# EAGLE board T01_Synth_Glove_v5_nsayre_revisions_late_am (EAGLE 7.1.0)
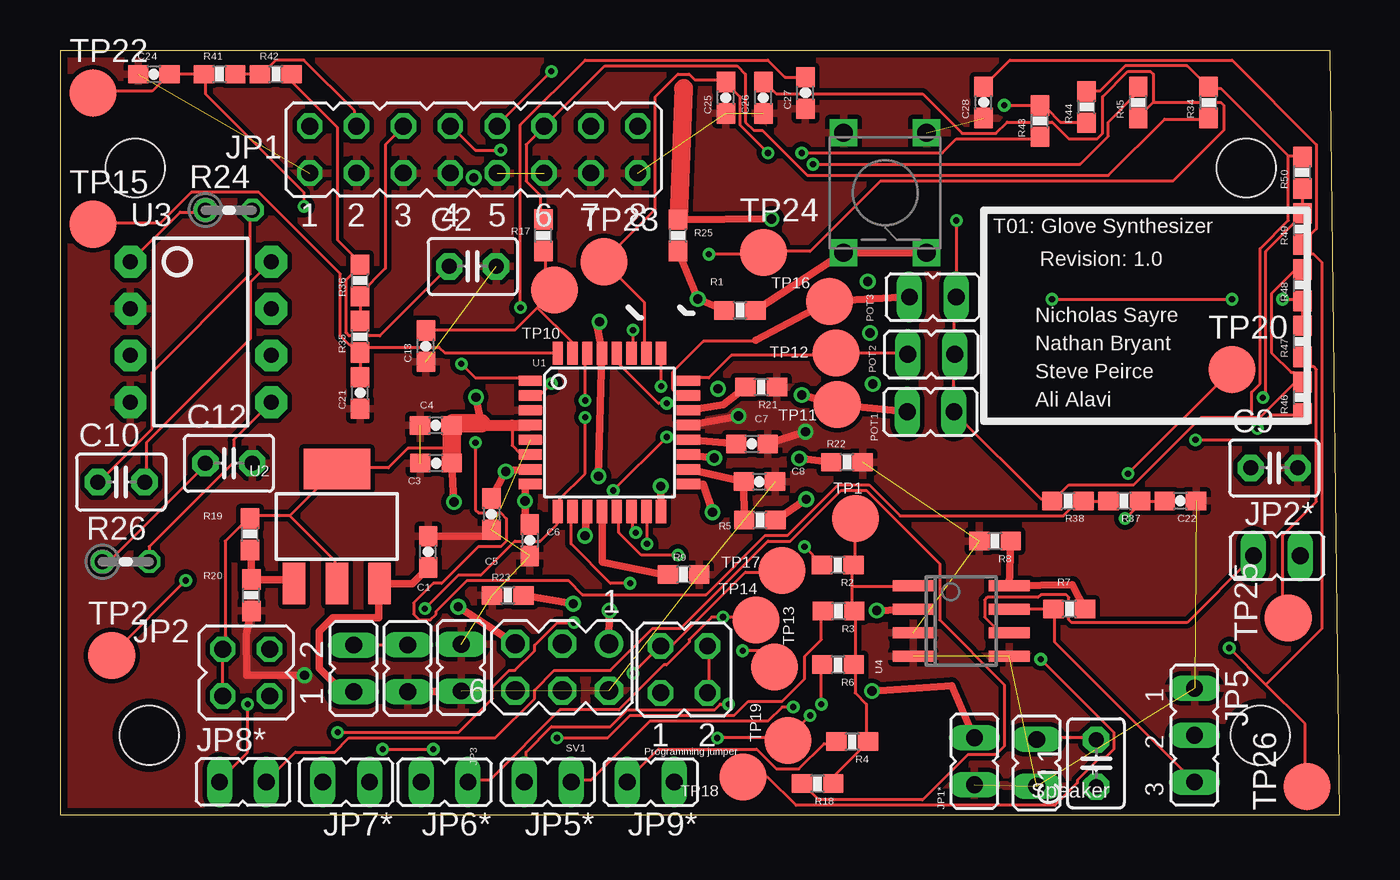
[diagram p0: board, top side]
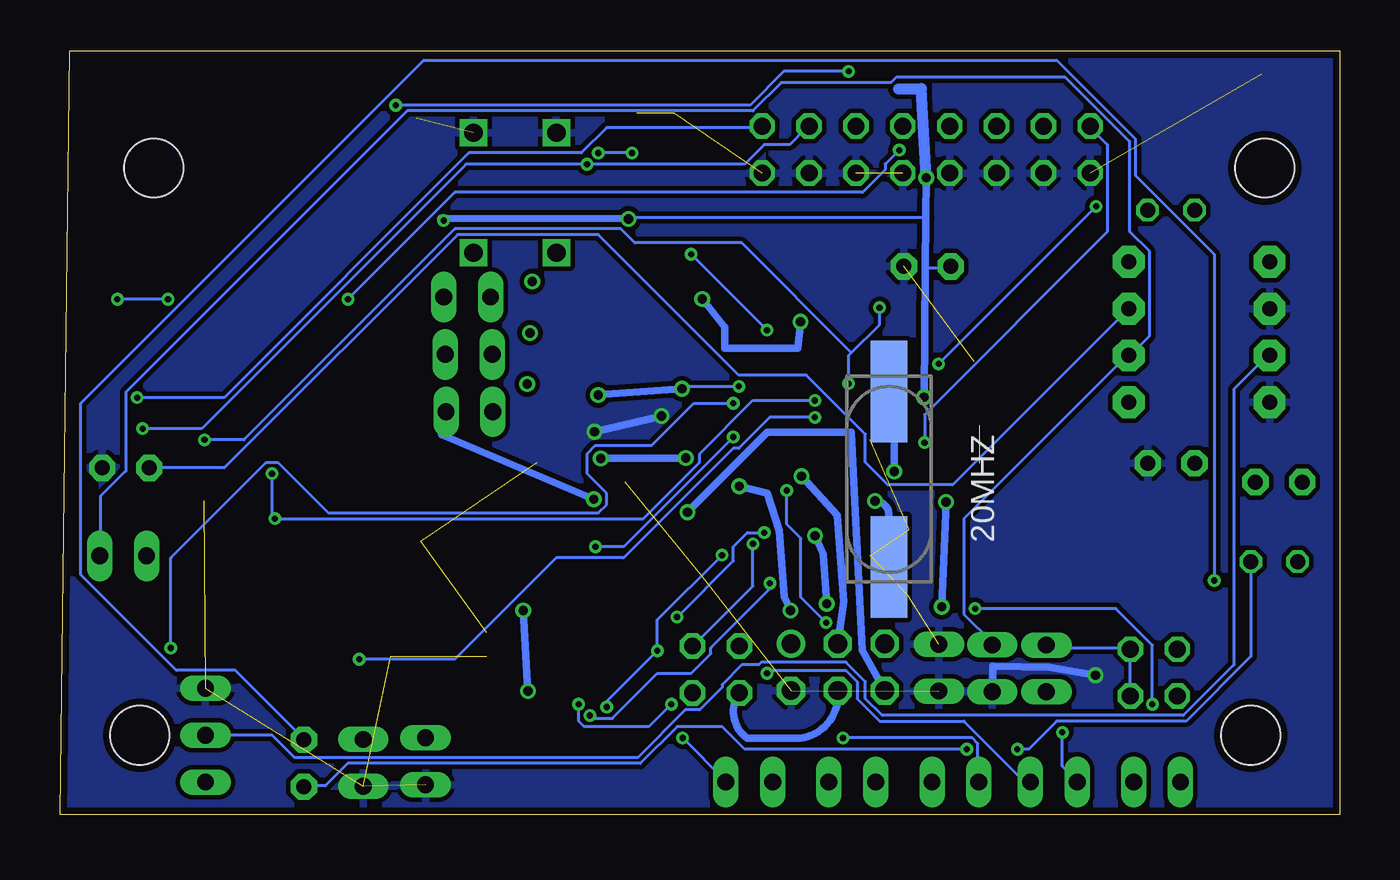
[diagram p1: board, bottom side, seen from below]

Size 69.34 x 41.4 mm. Coordinates in mm from the lower left corner, seen from the top.
Outline: 0,0 69.34,0 68.83,41.4 0,41.4 0,0
Copper layers (1*16): Top 0.0356mm / dielectric 1.5011mm / Bottom 0.0356mm
Design rules "OSH-Park-2-layer": minimum track width 6mil, minimum drill 13mil, track to track 6mil, track to pad 6mil, pad to pad 6mil, via to via 6mil, smd to smd 6mil, copper to edge 15mil, drill to drill 6mil, minimum pad ring 7mil, minimum via ring 7mil, stop-mask expansion 3mil, vias tented up to drill 0mil, thermal gap 10mil
Holes 3.2 mm at 4.83,4.32 64.26,35.05 4.06,35.05 65.02,4.32

## Footprints (pad centres in the part's own frame; a part is rotated, then mirrored left to right if it is on the bottom)
CSM-7X-DU = smd 5.5 x 2: 1 -4.75,0; 2 4.75,0
0603-CAP = smd 1.1 x 1: 1 -0.85,0; 2 0.85,0
C025-030X050 = drill 0.813 pad 1.422 octagon: 1 -1.27,0; 2 1.27,0
JP8Q = drill 0.914 octagon: 1 -8.89,-1.27; 2 -8.89,1.27; 3 -6.35,-1.27; 4 -6.35,1.27; 5 -3.81,-1.27; 6 -3.81,1.27; 7 -1.27,-1.27; 8 -1.27,1.27; 9 1.27,-1.27; 10 1.27,1.27; 11 3.81,-1.27; 12 3.81,1.27; 13 6.35,-1.27; 14 6.35,1.27; 15 8.89,-1.27; 16 8.89,1.27
JP1 = drill 0.914 long: 1 0,-1.27; 2 0,1.27
JP2Q = drill 0.914 octagon: 1 -1.27,-1.27; 2 1.27,-1.27; 3 -1.27,1.27; 4 1.27,1.27
JP2 = drill 0.914 long: 1 -2.54,0; 2 0,0; 3 2.54,0
0603-RES = smd 1.1 x 1: 1 -0.85,0; 2 0.85,0
0204V = drill 0.813 octagon: 1 -1.27,0; 2 1.27,0
MA03-2 = drill 1.016: 1 -2.54,-1.27 | drill 1.016 octagon: 2 -2.54,1.27; 3 0,-1.27; 4 0,1.27; 5 2.54,-1.27; 6 2.54,1.27
RESET_BUTTON = drill 0.991 square: 1 3.251,2.248; 2 3.251,-2.248; 3 -3.251,2.248; 4 -3.251,-2.248
B2,54 = smd 2.54 x 2.54: TP 0,0
TQFP32-08 = smd 1.27 x 0.559: 1 -4.293,2.8; 2 -4.293,2; 3 -4.293,1.2; 4 -4.293,0.4; 5 -4.293,-0.4; 6 -4.293,-1.2; 7 -4.293,-2; 8 -4.293,-2.8; 17 4.293,-2.8; 18 4.293,-2; 19 4.293,-1.2; 20 4.293,-0.4; 21 4.293,0.4; 22 4.293,1.2; 23 4.293,2; 24 4.293,2.8 | smd 0.559 x 1.27: 9 -2.8,-4.293; 10 -2,-4.293; 11 -1.2,-4.293; 12 -0.4,-4.293; 13 0.4,-4.293; 14 1.2,-4.293; 15 2,-4.293; 16 2.8,-4.293; 25 2.8,4.293; 26 2,4.293; 27 1.2,4.293; 28 0.4,4.293; 29 -0.4,4.293; 30 -1.2,4.293; 31 -2,4.293; 32 -2.8,4.293
SOT223 = smd 1.219 x 2.235: 1 -2.311,-3.099; 2 0,-3.099; 3 2.311,-3.099 | smd 3.6 x 2.2: 4 0,3.099
DIP08 = drill 0.813 pad 1.727 octagon: 1 -3.81,-3.81; 2 -1.27,-3.81; 3 1.27,-3.81; 4 3.81,-3.81; 5 3.81,3.81; 6 1.27,3.81; 7 -1.27,3.81; 8 -3.81,3.81
SO08 = smd 0.6 x 2.2: 1 -1.905,-2.6; 2 -0.635,-2.6; 3 0.635,-2.6; 4 1.905,-2.6; 5 1.905,2.6; 6 0.635,2.6; 7 -0.635,2.6; 8 -1.905,2.6

## Placement (x,y rotation side)
20MHZ  CSM-7X  [CSM-7X-DU]  24.43,18.18 270 bottom
C1  10u  [0603-CAP]  19.94,14.25 90 top
C2  100u  [C025-030X050]  22.35,29.72 0 top
C3  100n  [0603-CAP]  20.37,19.06 180 top
C4  100n  [0603-CAP]  20.35,21.1 180 top
C5  22p  [0603-CAP]  23.36,16.3 270 top
C6  22p  [0603-CAP]  25.45,14.88 270 top
C7  100n  [0603-CAP]  37.49,20.1 0 top
C8  100n  [0603-CAP]  37.89,18.05 0 top
C9  100n  [C025-030X050]  65.79,18.8 0 top
C10  10u  [C025-030X050]  3.3,18.03 0 top
C11  250u  [C025-030X050]  56.13,2.79 90 top
C12  50n  [C025-030X050]  9.14,19.05 0 top
C13  10n  [0603-CAP]  19.81,25.4 90 top
C21  10n  [0603-CAP]  16.26,22.86 90 top
C22  10n  [0603-CAP]  60.71,17.02 180 top
C24  10n  [0603-CAP]  5.08,40.13 0 top
C25  10n  [0603-CAP]  36.07,38.86 90 top
C26  10n  [0603-CAP]  38.1,38.86 90 top
C27  10n  [0603-CAP]  40.39,39.12 90 top
C28  10n  [0603-CAP]  50.04,38.61 90 top
JP1  0  [JP8Q]  22.41,36.05 0 top
JP1*  0  [JP1]  49.54,2.91 180 top
JP2  0  [JP2Q]  10.08,7.71 90 top
JP2*  0  [JP1]  65.93,14.03 90 top
JP3  0  [JP1]  21.73,7.98 180 top
JP5  0  [JP2]  61.47,4.32 270 top
JP5*  0  [JP1]  26.42,1.78 90 top
JP6*  0  [JP1]  20.83,1.78 90 top
JP7*  0  [JP1]  15.49,1.78 90 top
JP8*  0  [JP1]  9.91,1.78 270 top
JP9*  0  [JP1]  32,1.78 90 top
POT1  0  [JP1]  47.16,21.84 90 top
POT2  0  [JP1]  47.21,24.95 90 top
POT3  0  [JP1]  47.29,28.06 90 top
PROG.JMP  0  [JP2Q]  33.81,7.88 0 top
R1  330  [0603-RES]  36.83,27.33 0 top
R2  100k  [0603-RES]  42.13,13.54 180 top
R3  100k  [0603-RES]  42.18,11.04 180 top
R4  NP  [0603-RES]  42.92,3.97 180 top
R5  100k  [0603-RES]  37.92,15.97 0 top
R6  100k  [0603-RES]  42.15,8.14 180 top
R7  1k  [0603-RES]  54.68,11.17 180 top
R8  100k  [0603-RES]  50.66,14.83 180 top
R9  1k  [0603-RES]  33.78,13.02 180 top
R17  1k  [0603-RES]  26.18,31.4 90 top
R18  100k  [0603-RES]  41.04,1.69 180 top
R19  100  [0603-RES]  10.29,15.21 90 top
R20  330  [0603-RES]  10.36,11.9 90 top
R21  1k  [0603-RES]  37.99,23.18 180 top
R22  1k  [0603-RES]  42.63,19.11 180 top
R23  1k  [0603-RES]  24.25,11.9 0 top
R24  1.2k  [0204V]  9.14,32.77 0 top
R25  10k  [0603-RES]  33.49,31.4 90 top
R26  10  [0204V]  3.56,13.72 0 top
R34  1k  [0603-RES]  62.23,38.61 90 top
R35  1k  [0603-RES]  16.26,25.91 90 top
R36  1k  [0603-RES]  16.26,28.96 90 top
R37  1k  [0603-RES]  57.66,17.02 180 top
R38  1k  [0603-RES]  54.61,17.02 180 top
R41  1k  [0603-RES]  8.64,40.13 0 top
R42  1k  [0603-RES]  11.68,40.13 0 top
R43  1k  [0603-RES]  53.09,37.59 90 top
R44  1k  [0603-RES]  55.63,38.35 90 top
R45  1k  [0603-RES]  58.42,38.61 90 top
R46  1k  [0603-RES]  67.31,22.61 90 top
R47  1k  [0603-RES]  67.31,25.65 90 top
R48  1k  [0603-RES]  67.31,28.7 90 top
R49  1k  [0603-RES]  67.31,31.75 90 top
R50  1k  [0603-RES]  67.31,34.8 90 top
SV1  0  [MA03-2]  27.2,8 180 top
SW1  RESET_BUTTON  [RESET_BUTTON]  44.7,33.71 90 top
TP1  PTR1B2,54  [B2,54]  43.08,16.06 0 top
TP2  PTR1B2,54  [B2,54]  2.79,8.64 0 top
TP10  PTR1B2,54  [B2,54]  26.78,28.45 180 top
TP11  PTR1B2,54  [B2,54]  42.11,22.23 0 top
TP12  PTR1B2,54  [B2,54]  42.04,25.03 0 top
TP13  PTR1B2,54  [B2,54]  38.71,8 0 top
TP14  PTR1B2,54  [B2,54]  37.7,10.55 0 top
TP15  PTR1B2,54  [B2,54]  1.78,32 0 top
TP16  PTR1B2,54  [B2,54]  41.69,27.82 0 top
TP17  PTR1B2,54  [B2,54]  39.11,13.25 0 top
TP18  PTR1B2,54  [B2,54]  37.01,2.06 0 top
TP19  PTR1B2,54  [B2,54]  39.45,4.04 0 top
TP20  PTR1B2,54  [B2,54]  63.5,24.13 0 top
TP22  PTR1B2,54  [B2,54]  1.78,39.12 0 top
TP23  PTR1B2,54  [B2,54]  29.46,29.97 0 top
TP24  PTR1B2,54  [B2,54]  38.1,30.48 0 top
TP25  PTR1B2,54  [B2,54]  66.55,10.67 90 top
TP26  PTR1B2,54  [B2,54]  67.56,1.52 90 top
U1  ATMEGA328P  [TQFP32-08]  29.76,20.72 0 top
U2  ZLDO1117  [SOT223]  14.99,15.63 0 top
U3  LM386  [DIP08]  7.62,26.16 270 top
U4  LT1013  [SO08]  48.83,10.51 270 top
U$1  SPEAKER  [JP1]  52.92,2.81 180 top
U$7  POWER_SWITCH  [JP1]  15.9,7.93 180 top
U$8  9VOLTBATTERY  [JP1]  18.83,7.93 180 top

## Library data of the parts
20MHZ = crystal; OC_FARNELL: unknown; OC_NEWARK: unknown
C1 C3-C8 C13 C21 C22 C24-C28 = SparkFun-Capacitors
C2 C9-C12 R24 R26 = adafruit
JP1 JP1* JP2 JP2* JP3 JP5 JP5* JP6* JP7* JP8* JP9* POT1-POT3 PROG.JMP = jumper
R1-R9 R17-R23 R25 R34-R38 R41-R50 = SparkFun-Resistors
SV1 = con-lstb; OC_FARNELL: unknown; OC_NEWARK: unknown
SW1 U2 U4 U$1 U$7 U$8 = Synth_Glove
TP1 TP2 TP10-TP20 TP22-TP26 = testpad
U1 = SparkFun-DigitalIC; PROD_ID: IC-09069
U3 = SparkFun-AnalogIC

## Nets
+5V: C2.1 C3.1 C4.1 JP2.3 JP2.4 POT1.1 POT2.1 POT3.1 R5.2 R19.2 R25.2 R34.2 R36.2 R38.2 R42.2 R44.2 R46.2 R48.2 R50.2 SV1.5 U1.4 U1.6 U2.2 U2.4
+9V: JP2*.1 JP2.1 JP2.2 U3.6 U$7.1 U$8.1
A0: POT1.2 TP11.TP U1.25
A1: POT2.2 TP12.TP U1.24
A2: POT3.2 TP16.TP U1.23
D0: C22.2 R37.1 TP20.TP U1.30
D1: C13.2 R17.1 TP10.TP U1.31
D2: C21.2 R35.1 TP15.TP U1.32
D3: C24.2 R41.1 TP22.TP U1.1
D4: C27.2 R47.1 TP25.TP U1.2
D5: C25.2 R43.1 TP23.TP U1.26
D6: C26.2 R45.1 TP24.TP U1.27
D7: C28.2 R49.1 TP26.TP U1.28
GND: C1.2 C2.2 C3.2 C4.2 C5.2 C6.2 C7.2 C8.2 C9.2 C12.2 C13.1 C21.1 C22.1 C24.1 C25.1 C26.1 C27.1 C28.1 JP1*.2 JP1.1 JP1.3 JP1.5 JP1.7 JP1.9 JP1.11 JP1.13 JP1.15 JP3.1 JP3.2 JP5.1 R8.2 R9.1 R20.1 R21.1 R22.1 R23.1 SV1.2 SW1.1 SW1.2 U1.3 U1.5 U1.21 U3.2 U3.4 U4.3 U4.4 U4.5 U$1.2 U$8.2
MISO: SV1.1 U1.16
MOSI: PROG.JMP.1 SV1.4
N$1: C7.1 U1.20
N$2: JP1.14 R45.2 R46.1
N$6: 20MHZ.1 C5.1 U1.7
N$7: 20MHZ.2 C6.1 U1.8
N$8: C8.1 R5.1 U1.18
N$9: R21.2 U1.22
N$10: R22.2 U1.19
N$13: JP1.6 R35.2 R36.1
N$16: R7.1 R8.1 U4.8
N$17: R9.2 U1.12
N$18: JP5*.2 R6.2
N$21: JP9*.2 R4.2
N$22: R1.2 SW1.3 SW1.4
N$23: JP1.12 R17.2 R34.1
N$25: JP8*.2 R18.2
N$27: C10.1 R24.2
N$31: C11.2 TP2.TP U$1.1
N$32: JP7*.2 R2.2
N$34: JP2*.2 U4.6
N$36: JP5.3 R7.2 U4.7
N$37: R19.1 R20.2 U2.1
N$38: C1.1 U2.3 U$7.2
N$39: JP6*.2 R3.2
N$40: R24.1 U3.1
N$41: C10.2 U3.8
N$43: JP1.2 R37.2 R38.1
N$44: JP5.2 U3.3
N$46: JP1.4 R41.2 R42.1
N$47: C9.1 U3.7
N$48: JP1.10 R43.2 R44.1
N$49: C11.1 R26.2 U3.5
N$50: C12.1 R26.1
N$52: JP1.8 R47.2 R48.1
N$53: JP1.16 R49.2 R50.1
PB0: JP5*.1 TP13.TP U1.13
PB1: JP6*.1 TP14.TP U1.14
PB2: JP7*.1 PROG.JMP.3 TP17.TP
PB3: JP8*.1 TP18.TP U1.9
PB3/MOSI: PROG.JMP.2 PROG.JMP.4 U1.15
PB4: JP9*.1 TP19.TP U1.10
PD7: R23.2 U1.11
RESET: R1.1 R25.1 SV1.3 U1.29
SCK: SV1.6 U1.17
SUMS: R2.1 R3.1 R4.1 R6.1 R18.1 TP1.TP U4.1
V-: JP1*.1 U4.2

## Tracks (layer width: path | path; a pad name or v marks a point on that pad's centre or on a via)
+5V  (via drill 0.33, 0.5)
  Top 0.152: R44.2 55.73,39.22 56.34,39.22 57.71,40.59 61.06,40.59 62.13,39.52 R34.2 62.28,39.37 62.89,39.37 66.55,35.71 | 66.55,35.71 67.31,35.71 R50.2 | 67.16,23.67 66.85,23.98 66.7,23.98 65.63,25.04 65.63,28.25 66.85,29.46 67.31,29.46 R48.2 | 67.16,23.67 67.31,23.52 R46.2 67.16,23.67 | 67.16,23.67 65.02,21.54 64.57,21.54 | 64.57,21.54 61.82,21.54 58.17,17.88 54.66,17.88 53.9,17.12 R38.2 53.75,17.12 53.14,17.12 48.56,21.69 POT1.1 48.41,21.84 48.41,24.89 POT2.1 48.41,25.04 48.41,27.94 POT3.1 48.56,28.09 v48.56,32.21 | 66.55,35.71 66.55,32.21 65.02,30.68 65.02,23.37 64.57,22.91 64.57,21.54 | JP2.3 8.79,6.45 8.79,8.89 JP2.4 8.94,9.04 8.94,14.83 10.16,16.05 R19.2 10.31,16.21 12.45,16.21 | 12.45,16.21 14.88,18.64 U2.4 15.04,18.8 17.78,18.8 18.85,19.86 21.22,19.86 | 12.45,16.21 14.88,13.77 14.88,12.55 U2.2 | 24.49,21.12 24.49,20.02 24.94,19.56 25.4,19.56 U1.6 | C2.1 17.32,25.96 15.65,25.96 15.49,26.11 15.49,29.01 16.26,29.77 R36.2 16.26,29.92 15.04,31.14 15.04,37.24 12.6,39.68 12.6,40.13 R42.2
  Top 0.406: U1.4 25.27,21.12 | 21.21,21.12 C4.1 | R25.2 v38.55,32.29 | v40.42,17.09 R5.2 | 22.84,21.14 22.82,21.21 v22.53,22.62 | SV1.5 v21.58,11.28 | v21.34,16.95 C3.1
  Top 0.61: 22.84,21.14 arc90 22.85,21.12 24.49,21.12 U1.4
  Top 1.016: R25.2 arc90 33.53,32.29 33.78,39.37 arc-90 33.76,39.35 | 21.21,21.12 arc-90 21.22,21.11 21.22,19.86 C3.1 | C4.1 arc-90 21.3,21.21 22.82,21.21
  Bottom 0.152: 48.68,20.6 48.72,20.78 48.72,21.54 48.56,21.69 POT1.1 | 22.46,29.62 22.35,29.62 21.13,29.62 C2.1 | v38.55,32.29 38.35,32.36 22.5,32.36 22.43,32.36 | v48.56,32.21 48.56,32.32
  Bottom 0.406: v40.42,17.09 48.68,20.6 | v38.55,32.29 48.56,32.32 48.71,32.32 | v21.58,11.28 v21.34,16.95 | v22.53,22.62 22.46,29.62 22.43,32.36 v22.41,34.52
  Bottom 0.61: v22.41,34.52 arc90 22.42,34.54 22.68,39.34 | 22.68,39.34 arc90 22.66,39.35 | 23.92,39.34 22.68,39.34
+9V
  Top 0.152: U$7.1 15.95,9.2 18.69,9.2 U$8.1
  Bottom 0.152: JP2.1 11.38,6.45 11.38,8.89 JP2.2 11.38,9.04 15.65,9.04 15.8,9.2 U$7.1 | JP2*.1 67.16,14.07 67.16,17.27 65.79,18.64 65.79,22.91 50.55,38.15 31.8,38.15 30.28,39.68 24.33,39.68 24.03,39.98 14.88,39.98 11.38,36.47 11.38,31.6 10.31,30.53 10.31,25.96 11.38,24.89 U3.6 11.53,24.89 20.37,16.05 20.37,10.87 18.85,9.35 U$8.1
A0  (via drill 0.33, 0.5)
  Top 0.152: v32.56,23.22 32.56,24.89 U1.25
  Top 0.406: POT1.2 TP11.TP v40.18,22.75
  Bottom 0.152: v32.56,23.22 35.61,23.22 v35.64,23.08
  Bottom 0.406: v35.64,23.08 v40.18,22.75
A1
  Top 0.152: U1.24 34.09,23.67 35.15,23.67 36.37,24.89 42.01,24.89 TP12.TP 42.16,25.04 45.82,25.04 POT2.2
A2
  Top 0.152: U1.23 33.93,22.76 33.48,22.76 33.17,23.06 33.17,23.98 34.85,25.65 37.59,25.65 37.69,25.72
  Top 0.406: 37.69,25.72 TP16.TP POT3.2
D0  (via drill 0.33)
  Top 0.152: 58.62,16.97 59.84,16.97 C22.2 | v28.45,22.45 28.45,24.89 U1.30 | 58.62,16.97 v57.71,16.05 | 58.62,16.97 R37.1 | v57.86,18.49 TP20.TP
  Bottom 0.152: v28.45,22.45 31.8,22.45 34.7,19.56 34.7,19.1 37.74,16.05 v57.71,16.05 57.86,16.21 v57.86,18.49
D1
  Top 0.152: 25.86,27.48 26.77,28.4 TP10.TP 26.77,28.55 26.31,29.01 26.31,30.53 R17.1 | 25.86,27.48 24.64,26.26 19.91,26.26 C13.2 | 25.86,27.48 27.69,25.65 27.69,25.04 U1.31
D2
  Top 0.152: R35.1 16.26,24.89 | 16.26,24.89 C21.2 | U1.32 26.92,25.04 20.83,25.04 20.52,25.35 16.41,25.35 16.26,25.2 R35.1 | 16.26,24.89 15.19,25.96 15.19,29.31 10.77,33.73 7.11,33.73 5.44,32.05 1.78,32.05 TP15.TP | 16.26,25.04 R35.1
D3  (via drill 0.33)
  Top 0.152: v21.74,24.43 22.5,23.67 25.4,23.67 U1.1 | v13.21,32.97 13.21,33.73 7.87,39.07 7.87,40.13 R41.1 C24.2 5.89,40.13 4.98,39.22 1.78,39.22 TP22.TP
  Bottom 0.152: v13.21,32.97 v21.74,24.43
D4  (via drill 0.33)
  Top 0.152: 68.07,20.32 68.07,16.97 66.24,15.14 66.24,11.02 66.55,10.72 TP25.TP | 68.07,20.32 68.07,24.13 67.92,24.28 67.77,24.28 67.31,24.74 R47.1 | v24.94,27.48 24.94,37.39 28.45,40.89 38.35,40.89 39.27,39.98 40.34,39.98 C27.2 | v26.62,23.37 26.01,22.76 25.55,22.76 U1.2 | v61.52,20.32 68.07,20.32
  Bottom 0.152: v24.94,27.48 24.94,26.57 26.47,25.04 | 26.47,25.04 26.62,24.89 v26.62,23.37 | v61.52,20.32 59.38,20.32 47.95,31.75 38.96,31.75 38.2,30.99 32.41,30.99 26.47,25.04
D5  (via drill 0.33)
  Top 0.152: v40.18,35.87 47.8,35.87 48.56,36.63 52.98,36.63 R43.1 | v38.35,35.87 36.83,37.39 36.83,38.91 36.07,39.68 C25.2 36.07,39.83 34.39,39.83 34.09,40.13 33.48,40.13 32.26,38.91 32.26,32.82 29.52,30.07 TP23.TP 31.65,27.79 31.65,25.04 U1.26
  Bottom 0.152: v38.35,35.87 v40.18,35.87
D6  (via drill 0.33)
  Top 0.152: v31.04,26.26 31.04,25.04 U1.27 | v35.15,30.38 38.05,30.38 TP24.TP 38.2,30.53 40.64,30.53 44.45,34.34 60.3,34.34 63.04,37.08 63.04,38.46 62.89,38.61 59.23,38.61 | 59.23,38.61 58.47,37.85 R45.1 | 59.23,38.61 59.23,40.13 59.08,40.28 57.86,40.28 56.49,38.91 56.49,36.93 56.18,36.63 54.66,36.63 53.75,37.54 51.31,37.54 50.7,36.93 48.87,36.93 46.74,39.07 38.81,39.07 38.2,39.68 C26.2
  Bottom 0.152: v35.15,30.38 v31.04,26.26
D7  (via drill 0.33)
  Top 0.152: C28.2 50.09,39.52 51.46,40.89 63.5,40.89 68.07,36.32 68.07,31.75 67.31,30.99 R49.1 67.31,30.84 67.77,30.38 67.92,30.38 68.38,29.92 68.38,10.11 65.33,7.06 | v32.87,22.3 32.41,22.3 30.28,24.43 30.28,24.89 U1.28 | 65.33,7.06 67.46,4.93 67.46,1.57 TP26.TP | 65.33,7.06 v63.35,9.04
  Bottom 0.152: v32.87,22.3 35,22.3 37.29,20.02 40.34,20.02 40.79,19.56 40.79,18.49 39.73,17.42 39.73,16.82 40.18,16.36 54.81,16.36 57.56,19.1 58.17,19.1 63.35,13.92 v63.35,9.04
GND  (via drill 0.5)  (21 unrouted)
  Top 0.406: JP3.2 U$8.2 | v13.24,7.57 10.91,7.57 10.1,7.57 10.08,9.75 R20.1 | C5.2 arc-90 23.02,15.1 C1.2 | U1.21 v36.76,21.61 | v40.39,20.76 C7.2
  Bottom 0.406: v36.76,21.61 v40.39,20.76 | v13.24,7.57 15.74,8 18.8,8.06 U$8.2
  pour Bottom (isolate 0.254): 0,41.4 68.83,41.4 69.34,0 -0.25,-0.25
  pour Top (isolate 0.254): -0.25,0 69.34,0 68.83,41.4 0,41.4
MISO  (via drill 0.5)
  Top 0.406: SV1.1 v29.77,11.07 | v32.55,17.8 U1.16
  Bottom 0.406: v29.77,11.07 30.12,11.83 30.37,15.39 31.04,17.42 v32.55,17.8
MOSI
  Bottom 0.406: SV1.4 arc90 29.28,4.15 32.11,4.15 arc90 PROG.JMP.1
N$1
  Top 0.406: U1.20 C7.1
N$2  (via drill 0.33)
  Top 0.152: v40.79,35.26 55.27,35.26 56.79,36.78 56.79,37.54 58.32,39.07 58.32,39.37 R45.2 | v64.87,20.93 65.63,21.69 67.31,21.69 R46.1
  Bottom 0.152: JP1.14 28.91,37.24 29.82,36.32 31.19,36.32 32.26,35.26 v40.79,35.26 47.35,35.26 61.67,20.93 v64.87,20.93
N$6  (via drill 0.5)
  Top 0.406: U1.7 24.56,18.68 v24.14,18.61 C5.1
  Bottom 0.406: v24.14,18.61 24.18,22.68 20MHZ.1
N$7  (via drill 0.5)
  Top 0.406: U1.8 arc90 25.19,17.64 v25.19,17.01 25.19,15.99 arc90 C6.1
  Bottom 0.406: v25.19,17.01 arc90 24.43,16.25 20MHZ.2
N$8
  Top 0.406: U1.18 C8.1 R5.1
N$9
  Top 0.406: U1.22 35.93,22.21 R21.2
N$10  (via drill 0.5)
  Top 0.406: U1.19 v35.45,19.34 | v40.05,19.31 R22.2
  Bottom 0.406: v35.45,19.34 v40.05,19.31
N$13
  Top 0.152: R35.2 R36.1 16.26,28.25 17.63,29.62 17.63,36.32 18.54,37.24 JP1.6
N$16
  Top 0.406: R7.1 54.85,12.48 U4.8 R8.1
N$17
  Top 0.406: R9.2 32.57,13.04 29.39,13.68 29.37,13.7 U1.12
N$18  (via drill 0.33)
  Top 0.152: v41.25,5.99 41.25,8.13 R6.2 | v36.22,5.99 35.76,5.99 35.46,5.69 30.73,5.69 29.82,4.78 26.62,4.78 25.25,3.4 25.25,1.88 JP5*.2
  Bottom 0.152: v41.25,5.99 41.25,5.08 40.95,4.78 37.44,4.78 v36.22,5.99
N$21
  Top 0.152: R4.2 42.01,3.86 41.4,3.86 40.03,2.49 38.81,2.49 37.74,3.56 32.41,3.56 30.73,1.88 JP9*.2
N$22
  Top 0.406: SW1.4 SW1.3 R1.2
N$23
  Top 0.152: R17.2 26.01,32.36 26.01,33.58 25.25,34.34 25.25,36.32 26.16,37.24 JP1.12 26.31,37.39 29.52,40.59 36.68,40.59 37.13,40.13 37.13,37.54 37.59,37.08 38.05,37.08 40.49,34.65 56.79,34.65 59.84,37.69 62.13,37.69 R34.1
  Top 0.406: 26.22,32.29 R17.2
N$25
  Top 0.152: R18.2 40.34,1.57 41.1,0.81 46.74,0.81 49.17,3.25 50.7,3.25 51.16,3.71 51.16,7.06 47.65,10.57 47.65,13.61 43.69,17.58 42.32,17.58 39.57,14.83 38.35,14.83 33.63,10.11 32.11,10.11 29.82,7.82 26.77,7.82 25.71,6.76 25.71,6.3 23.57,4.17 15.65,4.17 14.88,3.4 12.75,3.4 11.23,1.88 JP8*.2
N$27
  Top 0.152: R24.2 10.31,32.66 10.31,29.31 4.98,23.98 4.98,20.93 2.08,18.03 C10.1
N$28  (via drill 0.5)
  other vias: 43.76,28.9
N$29  (via drill 0.5)
  other vias: 43.88,26.11
N$30  (via drill 0.5)
  other vias: 44.02,23.34
N$31  (via drill 0.33)
  Top 0.152: v6.81,12.7 2.85,8.74 TP2.TP | U$1.1 52.98,4.17 56.03,4.17 C11.2
  Bottom 0.152: v6.81,12.7 6.81,30.38 11.07,34.65 11.07,36.63 15.34,40.89 49.63,40.89 68.22,22.3 68.22,13 63.04,7.82 59.84,7.82 56.18,4.17 C11.2
N$32  (via drill 0.33)
  Top 0.152: v40.34,14.53 41.25,13.61 R2.2 | v29.97,17.58 v32.87,20.47 | v27.84,10.41 26.92,10.41 25.71,9.2 25.71,8.89 24.64,7.82 24.33,7.82 23.42,6.91 23.42,6.3 21.59,4.47 v15.04,4.47
  Bottom 0.152: v40.34,14.53 38.81,14.53 v32.87,20.47 | v29.97,17.58 29.97,15.75 29.21,14.99 29.21,11.79 v27.84,10.41 | v15.04,4.47 15.04,2.64 14.28,1.88 JP7*.2
N$34
  Top 0.152: U4.6 51.31,9.96 50.85,9.96 50.09,10.72 50.09,11.63 50.24,11.79 52.98,11.79 53.14,11.94 54.51,11.94 54.66,11.79 54.66,10.57 54.81,10.41 61.06,10.41 64.57,13.92 JP2*.2
N$36
  Top 0.152: U4.7 51.46,11.18 53.75,11.18 R7.2 53.9,11.02 53.9,9.35 JP5.3
N$37
  Top 0.406: U2.1 12.68,12.75 R20.2 10.36,14.36 R19.1
N$38
  Top 0.406: U$7.2 15.32,6.66 14.03,7.96 14.03,9.94 14.76,10.67 17.26,10.67 17.27,10.68 17.27,12.5 U2.3 19.08,12.54 C1.1
N$39  (via drill 0.33)
  Top 0.152: v26.92,4.17 29.67,4.17 30.89,5.38 36.52,5.38 37.29,6.15 39.12,6.15 40.34,7.37 40.34,8.59 41.25,9.5 41.25,11.02 R3.2
  Bottom 0.152: v26.92,4.17 19.91,4.17 19.61,3.86 19.61,1.88 JP6*.2
N$40
  Top 0.152: U3.1 6.5,32.66 7.87,32.66 R24.1
N$41
  Top 0.152: U3.8 10.31,28.85 10.31,25.81 4.67,20.17 4.67,18.03 C10.2
N$43  (via drill 0.33)
  Top 0.152: R37.2 56.79,16.97 55.57,16.97 R38.1 55.42,16.97 55.12,16.97 54.36,16.21 45.52,16.21 43.84,17.88 42.16,17.88 39.42,15.14 38.2,15.14 35,11.94 28.3,11.94 27.53,12.7 22.05,12.7 20.37,11.02 20.37,10.87 20.07,10.57 19.46,10.57 19.15,10.87 19.15,11.48 20.22,12.55 20.68,12.55 22.66,14.53 23.88,14.53 24.18,14.83 24.18,16.05 23.88,16.36 22.66,16.36 22.5,16.51 v22.5,20.17
  Bottom 0.152: v22.5,20.17 22.5,21.69 12.6,31.6 12.6,36.32 13.51,37.24 JP1.2
N$44
  Bottom 0.152: JP5.2 57.86,4.32 56.64,3.1 38.05,3.1 35.46,5.69 34.7,5.69 33.48,6.91 33.48,7.06 32.41,8.13 31.5,8.13 31.34,8.28 26.77,8.28 25.71,7.21 25.71,6.3 24.79,5.38 8.48,5.38 5.74,8.13 5.74,23.06 3.91,24.89 U3.3
N$46
  Top 0.152: R41.2 R42.1 10.92,40.13 11.68,40.89 13.21,40.89 15.95,38.15 15.95,37.39 JP1.4
N$47
  Bottom 0.152: C9.1 60.45,18.8 47.8,31.45 40.18,31.45 32.56,23.82 28.91,23.82 25.71,20.62 25.71,19.1 24.49,17.88 20.98,17.88 U3.7
N$48  (via drill 0.33)
  Top 0.152: R44.1 55.57,37.54 54.2,37.54 53.44,38.3 53.14,38.3 R43.2 52.98,38.46 v51.16,38.46 | v26.62,40.28 23.72,37.39 JP1.10
  Bottom 0.152: v51.16,38.46 31.95,38.46 30.12,40.28 v26.62,40.28
N$49  (via drill 0.33)
  Top 0.152: R26.2 4.83,14.53 9.4,19.1 9.4,20.32 U3.5 | v17.48,3.56 v20.22,3.56
  Bottom 0.152: v20.22,3.56 32.26,3.56 33.48,4.78 35.92,4.78 37.9,2.79 53.75,2.79 54.97,1.57 56.03,1.57 C11.1 | v17.48,3.56 16.87,3.56 15.34,5.08 8.33,5.08 4.83,8.59 R26.2
N$50
  Top 0.152: R26.1 2.39,13.77 2.69,13.77 7.87,18.95 C12.1
N$52  (via drill 0.33)
  Top 0.152: R47.2 R48.1 67.31,27.94 v66.24,27.94 | v53.75,27.94 v63.5,27.94 | v23.88,36.02 22.5,36.02 21.29,37.24 JP1.8
  Bottom 0.152: v63.5,27.94 v66.24,27.94 | v53.75,27.94 47.95,33.73 25.86,33.73 24.64,34.95 24.64,35.26 v23.88,36.02
N$53  (via drill 0.33)
  Top 0.152: R50.1 R49.2 67.31,32.51 65.33,30.53 65.33,22.76 v65.18,22.61
  Bottom 0.152: v65.18,22.61 60.45,22.61 47.19,35.87 41.1,35.87 39.73,37.24 31.34,37.24 JP1.16
PB0  (via drill 0.33)
  Top 0.152: v33.48,14.07 31.5,14.07 30.28,15.29 30.28,16.36 U1.13 | v36.98,8.89 37.9,8.89 38.66,8.13 TP13.TP | v39.73,5.84 39.12,5.84 38.35,5.08 31.95,5.08 28.75,1.88 27.69,1.88 JP5*.1
  Bottom 0.152: v33.48,14.07 36.98,10.57 v36.98,8.89 39.73,6.15 v39.73,5.84
PB1  (via drill 0.33)
  Top 0.152: v31.19,15.29 31.04,15.44 31.04,16.36 U1.14 | TP14.TP 37.59,10.57 37.44,10.72 v35.92,10.72 35.31,10.72 34.09,9.5 34.09,9.35 32.87,8.13 32.71,8.13 30.28,5.69 27.08,5.69 23.27,1.88 22.2,1.88 JP6*.1
  Bottom 0.152: v31.19,15.29 32.11,15.29 32.87,14.53 32.87,13.77 v35.92,10.72
PB2  (via drill 0.33)
  Top 0.152: TP17.TP 38.96,13.16 37.13,13.16 33.17,9.2 32.56,9.2 PROG.JMP.3 32.41,9.04 v31.04,7.67
  Bottom 0.152: v31.04,7.67 30.89,7.82 26.77,7.82 26.16,7.21 26.16,6.3 24.94,5.08 20.37,5.08 17.17,1.88 16.87,1.88 JP7*.1
PB3  (via drill 0.33)
  Top 0.152: v19.76,11.18 21.59,13 22.81,13 24.64,14.83 26.01,14.83 26.92,15.75 26.92,16.36 U1.9 27.08,16.51 27.08,17.12 28.45,18.49 v28.45,21.54 | v10.16,5.99 10.16,3.4 8.64,1.88 JP8*.1 | v53.14,8.43 57.1,4.47 57.1,3.56 56.64,3.1 56.34,3.1 55.12,1.88 55.12,1.73 53.9,0.51 39.88,0.51 38.35,2.03 37.13,2.03 TP18.TP
  Bottom 0.152: v19.76,11.18 12.14,11.18 10.16,9.2 v10.16,5.99 | v53.14,8.43 47.95,8.43 42.47,13.92 38.81,13.92 32.87,19.86 32.56,19.86 30.89,21.54 v28.45,21.54
PB3/MOSI  (via drill 0.33)
  Top 0.152: v31.8,14.68 31.8,16.36 U1.15 | PROG.JMP.2 35.15,6.76 35.15,9.04 PROG.JMP.4
  Bottom 0.152: v31.8,14.68 31.8,12.39 35,9.2 PROG.JMP.4
PB4  (via drill 0.33)
  Top 0.152: v30.89,12.55 29.82,12.55 27.69,14.68 27.69,16.36 U1.10 | 39.42,4.17 v40.64,5.38 | 39.42,4.17 v35.61,4.17 | 39.42,4.17 TP19.TP
  Bottom 0.152: v30.89,12.55 30.89,12.24 34.09,9.04 34.09,8.74 35.15,7.67 36.98,7.67 39.42,5.23 40.49,5.23 v40.64,5.38 | v35.61,4.17 33.32,1.88 JP9*.1
PD7  (via drill 0.5)
  Top 0.406: U1.11 v28.44,15.13 | v27.8,11.43 R23.2
  Bottom 0.406: v28.44,15.13 27.99,14.12 v27.8,11.43
RESET  (via drill 0.5)
  Top 0.406: v29.22,26.71 arc-90 29.04,26.74 U1.29 29.35,25 v29.17,18.35 | R1.1 v34.56,27.96 R25.1
  Bottom 0.406: v29.22,26.71 29.36,25.29 33.32,25.29 33.32,26.43 v34.56,27.96 | v29.17,18.35 27.23,16.23 26.89,11.54 SV1.3
SCK  (via drill 0.5)
  Top 0.406: v35.35,16.4 34.85,17.92 U1.17
  Bottom 0.406: SV1.6 25.88,8.91 26.46,20.72 31.04,20.72 v35.35,16.4
SUMS
  Top 0.152: R18.1 42.01,1.73 42.01,2.18 43.69,3.86 R4.1 43.69,4.01 43.69,5.99 43.08,6.6 43.08,8.13 R6.1 43.08,8.28 43.08,11.02 R3.1 42.93,11.18 42.93,12.39 | 42.93,12.39 42.93,13.46 R2.1 43.08,13.61 TP1.TP | 42.93,12.39 46.13,12.39 U4.1
V-  (via drill 0.5)
  Top 0.406: JP1*.1 48.31,7.01 v44,6.71 | v44.24,11.07 U4.2
  Bottom 0.406: v44,6.71 v44.24,11.07

## Text on the board
tPlace: T01: Glove Synthesizer | Revision: 1.0 | Nicholas Sayre | Nathan Bryant | Steve Peirce | Ali Alavi | Programming jumper | - | + | Speaker